# EAGLE board Zarici_hvezda (EAGLE 9.6.2)
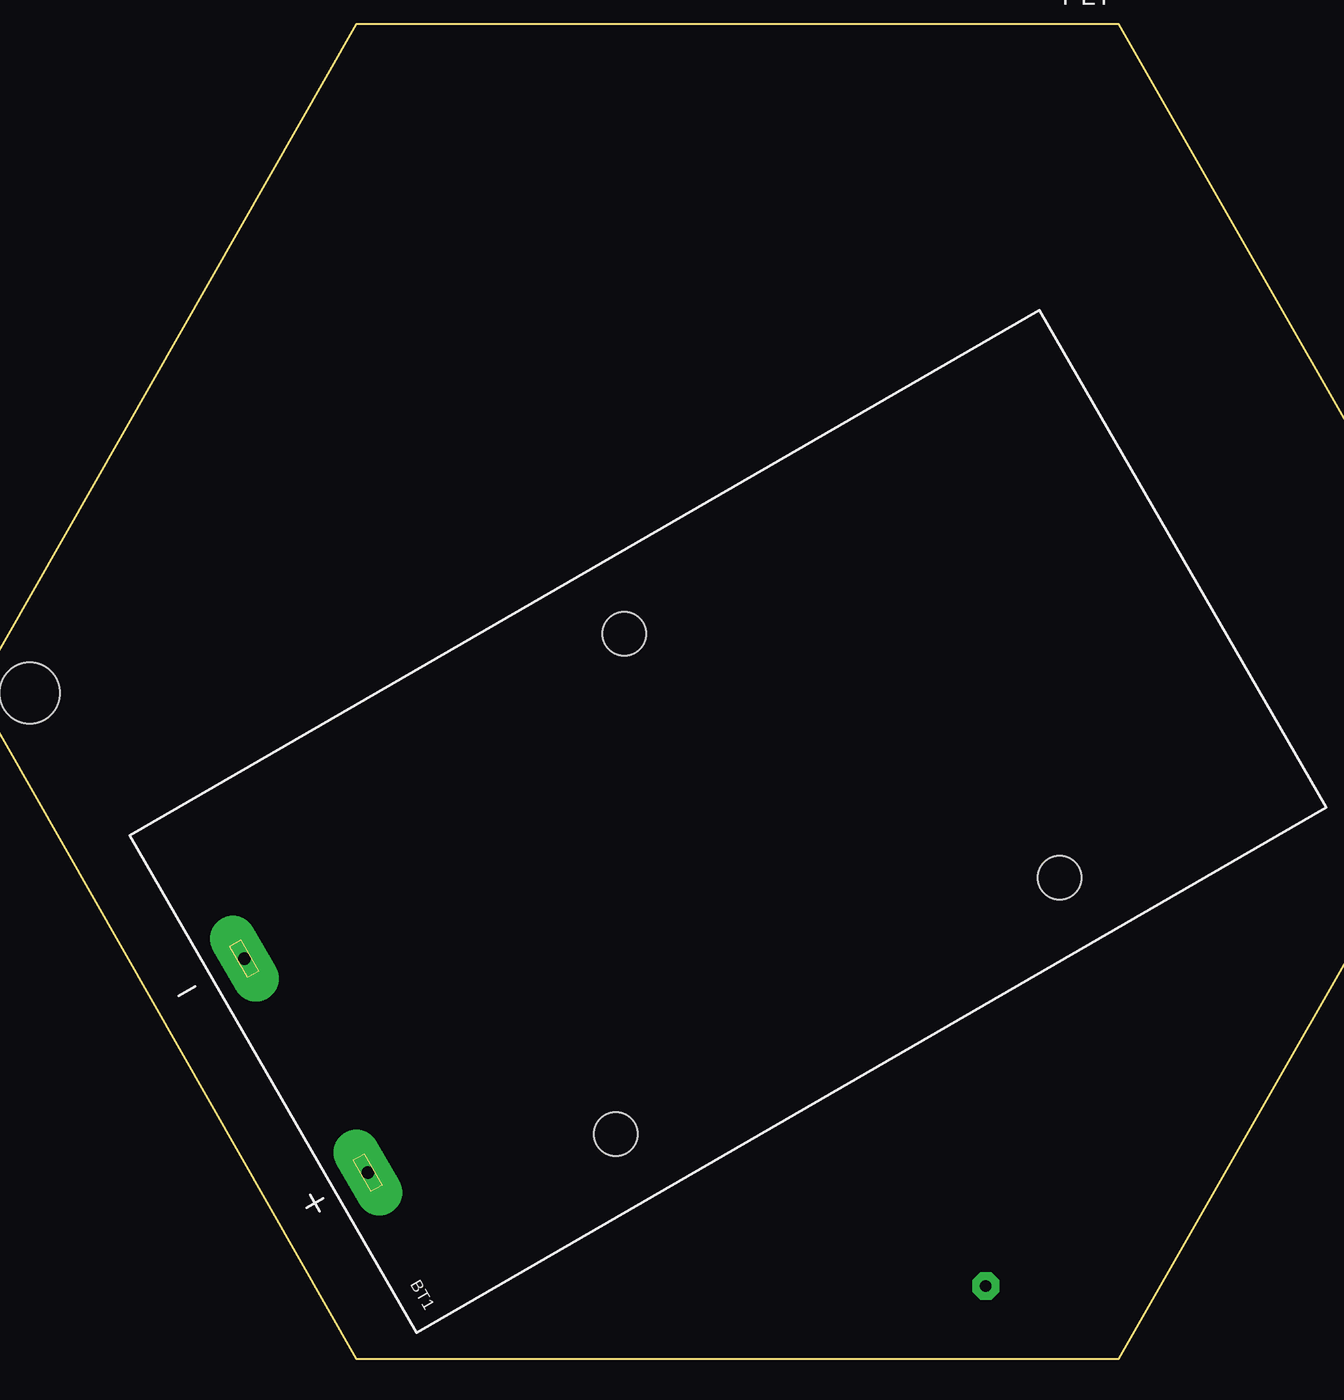
[diagram p0: board, top side]
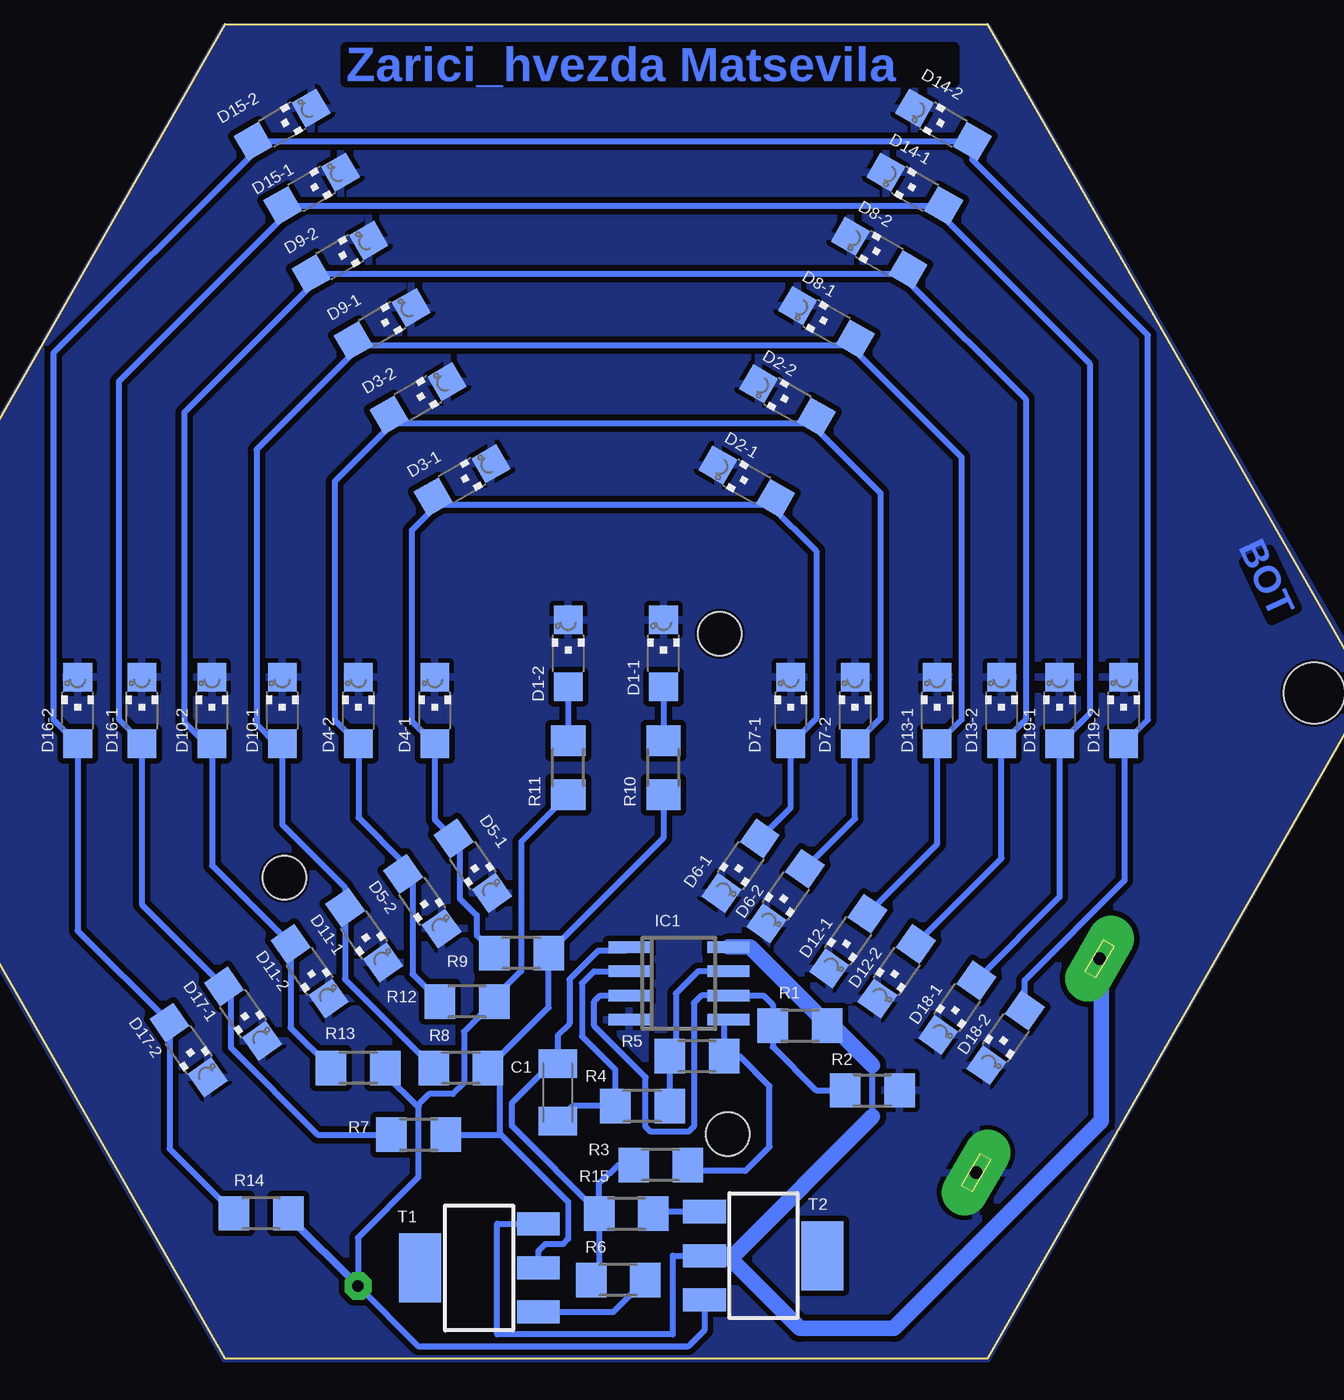
[diagram p1: board, bottom side, seen from below]

No outline drawn. Coordinates in mm, seen from the top.
Copper layers (1*16): Top 0.035mm / dielectric 1.5mm / Bottom 0.035mm
Design rules "default *": minimum track width 12mil, minimum drill 0.35mm, track to track 12mil, track to pad 12mil, pad to pad 12mil, via to via 12mil, smd to smd 12mil, copper to edge 6mil, drill to drill 6mil, minimum pad ring 10mil, minimum via ring 8mil, stop-mask expansion 4mil, vias tented up to drill 0mil, thermal gap 10mil
Holes 3.2 mm at 2.86,34.92 77.15,34.92
Milling: 6 lines

## Footprints (pad centres in the part's own frame; a part is rotated, then mirrored left to right if it is on the bottom)
BAT_BC9VPC = drill 0.66 pad 2.41 long: N 25.781,-6.477; P 25.781,6.477 | hole 2.286: 13.487,11.227; -13.386,11.227; 0,-11.278
C1206K = smd 1.5 x 2: 1 -1.5,0; 2 1.5,0
CHIPLED_1206 = smd 1.5 x 1.5: A 0,-1.75; C 0,1.75
SO08 = smd 0.6 x 2.2: 1 -1.905,-2.6; 2 -0.635,-2.6; 3 0.635,-2.6; 4 1.905,-2.6; 5 1.905,2.6; 6 0.635,2.6; 7 -0.635,2.6; 8 -1.905,2.6
R1206 = smd 1.6 x 1.803: 1 -1.422,0; 2 1.422,0
SOT223 = smd 1.219 x 2.235: 1 -2.311,-3.099; 2 0,-3.099; 3 2.311,-3.099 | smd 3.6 x 2.2: 4 0,3.099

## Placement (x,y rotation side)
BT1  BC9VPC  [BAT_BC9VPC]  39.69,28.26 210 top
C1  1M  [C1206K]  42.55,13.97 90 bottom
D1-1  RG10  [CHIPLED_1206]  37,37 0 bottom
D1-2  RG10  [CHIPLED_1206]  42,37 0 bottom
D2-1  RG10  [CHIPLED_1206]  32.63,46 60 bottom
D2-2  RG10  [CHIPLED_1206]  30.5,50.27 60 bottom
D3-1  RG10  [CHIPLED_1206]  47.57,46.08 300 bottom
D3-2  RG10  [CHIPLED_1206]  49.88,50.38 300 bottom
D4-1  RG10  [CHIPLED_1206]  49,34 0 bottom
D4-2  RG10  [CHIPLED_1206]  53,34 0 bottom
D5-1  RG10  [CHIPLED_1206]  47,25.86 215 bottom
D5-2  RG10  [CHIPLED_1206]  49.65,23.99 215 bottom
D6-1  RG10  [CHIPLED_1206]  32.95,25.86 145 bottom
D6-2  RG10  [CHIPLED_1206]  30.59,24.27 145 bottom
D7-1  RG10  [CHIPLED_1206]  30.32,34 0 bottom
D7-2  RG10  [CHIPLED_1206]  26.95,34 0 bottom
D8-1  RG5  [CHIPLED_1206]  28.45,54.37 60 bottom
D8-2  RG5  [CHIPLED_1206]  25.68,58 60 bottom
D9-1  RG5  [CHIPLED_1206]  51.75,54.27 300 bottom
D9-2  RG5  [CHIPLED_1206]  53.98,57.78 300 bottom
D10-1  RG5  [CHIPLED_1206]  57,34 0 bottom
D10-2  RG5  [CHIPLED_1206]  60.68,34 0 bottom
D11-1  RG5  [CHIPLED_1206]  52.7,22.23 215 bottom
D11-2  RG5  [CHIPLED_1206]  55.56,20.32 215 bottom
D12-1  RG5  [CHIPLED_1206]  27.3,21.91 145 bottom
D12-2  RG5  [CHIPLED_1206]  24.77,20.32 145 bottom
D13-1  RG5  [CHIPLED_1206]  22.64,34 0 bottom
D13-2  RG5  [CHIPLED_1206]  19.27,34 0 bottom
D14-1  RG3  [CHIPLED_1206]  23.82,61.37 60 bottom
D14-2  RG3  [CHIPLED_1206]  22.32,64.73 60 bottom
D15-1  RG3  [CHIPLED_1206]  55.46,61.37 300 bottom
D15-2  RG3  [CHIPLED_1206]  57,64.73 300 bottom
D16-1  RG3  [CHIPLED_1206]  64.36,34 0 bottom
D16-2  RG3  [CHIPLED_1206]  67.73,34 0 bottom
D17-1  RG3  [CHIPLED_1206]  59.05,18.1 215 bottom
D17-2  RG3  [CHIPLED_1206]  61.91,16.19 215 bottom
D18-1  RG3  [CHIPLED_1206]  21.59,18.41 145 bottom
D18-2  RG3  [CHIPLED_1206]  19.05,16.83 145 bottom
D19-1  RG3  [CHIPLED_1206]  16.22,34 0 bottom
D19-2  RG3  [CHIPLED_1206]  12.86,34 0 bottom
IC1  LMV358M  [SO08]  36.2,19.68 270 bottom
R1  22k  [R1206]  29.84,17.46 0 bottom
R2  22k  [R1206]  26.04,14.07 180 bottom
R3  10k  [R1206]  37.15,10.16 0 bottom
R4  2M2  [R1206]  38.1,13.26 0 bottom
R5  22k  [R1206]  35.24,15.88 180 bottom
R6  22k  [R1206]  39.37,4.13 0 bottom
R7  27  [R1206]  49.85,11.75 0 bottom
R8  27  [R1206]  47.62,15.24 0 bottom
R9  27  [R1206]  44.45,21.27 0 bottom
R10  100  [R1206]  37,31 270 bottom
R11  470  [R1206]  42,31 270 bottom
R12  120  [R1206]  47.31,18.73 0 bottom
R13  120  [R1206]  53.02,15.24 0 bottom
R14  120  [R1206]  58.1,7.62 0 bottom
R15  33k  [R1206]  38.95,7.62 180 bottom
T1  BCP53  [SOT223]  46.67,4.76 90 bottom
T2  BCP53  [SOT223]  31.75,5.4 270 bottom

## Library data of the parts
BT1 = BC9VPC; CENA: 51,06; DISTRIBUTOR: DigiKey; MNUMBER: BC9VPC; OBJCISLO: BC9VPC-ND
C1 = _LED_DICE_v1_1; CENA: 7; DISTRIBUTOR: Hofman elektro; MNUMBER: 1M/63V MKT RM5; OBJCIALO: 883454
D1-1 D1-2 D2-1 D2-2 D3-1 D3-2 D4-1 D4-2 D5-1 D5-2 D6-1 D6-2 D7-1 D7-2 D8-1 D8-2 D9-1 D9-2 D10-1 D10-2 D11-1 D11-2 D12-1 D12-2 D13-1 D13-2 D14-1 D14-2 D15-1 D15-2 D16-1 D16-2 D17-1 D17-2 D18-1 D18-2 D19-1 D19-2 = _LED_DICE_v1_1; CENA: 12,74; DISTRIBUTOR: MOUSER; MNUMBER: APT3216SECK/J3-PRV; OBJCISLO: 604-APT3216SECKJ3PRV
IC1 = linear; CENA: 16,54; DISTRIBUTOR: Mouser Electronics; MNUMBER: 621-LMV358SG-13; OBJCISLO: LMV358SG-13
R1 R2 R5 R6 = _UsbToUart-v1.0; CENA: 0,47; DISTRIBUTOR: Conard; MNUMBER: CRCW120622K0FKEA; OBJCISLO: 3024773
R3 = _UsbToUart-v1.0; CENA: 0,14; DISTRIBUTOR: Conard; MNUMBER: CQ06W4J0103T5E; OBJCISLO: 2889567
R4 = _UsbToUart-v1.0; CENA: 1,21; DISTRIBUTOR: Official Electronic; MNUMBER: SMD 1206 2M2; OBJCISLO: 6001910
R7-R9 = _UsbToUart-v1.0; CENA: 0,13; DISTRIBUTOR: Conard; MNUMBER: RC1206FR-0727RL; OBJCISLO: 2777361
R10 = _UsbToUart-v1.0; CENA: 0,19; DISTRIBUTOR: Conard; MNUMBER: CQ06W4F1000T5E; OBJCISLO: 2889439
R11 = _UsbToUart-v1.0; CENA: 0,33; DISTRIBUTOR: Conard; MNUMBER: 1585631; OBJCISLO: 1585631
R12-R14 = _UsbToUart-v1.0; CENA: 0,07; DISTRIBUTOR: Conard; MNUMBER: WR12X1200FTL; OBJCISLO: 2769961
R15 = _UsbToUart-v1.0; CENA: 0,11; DISTRIBUTOR: Conard; MNUMBER: 1585955; OBJCISLO: 1585955
T1 T2 = #PaJa_31; CENA: 23,26; DISTRIBUTOR: Electronic Components; MNUMBER: BCP53-16; OBJCISLO: 31551828

## Nets
+9V: BT1.N IC1.8 R1.2 T1.3 T2.2
G3: D14-2.A D15-2.A D16-2.A D17-2.A D18-2.A D19-2.A R14.1
G5: D8-2.A D9-2.A D10-2.A D11-2.A D12-2.A D13-2.A R13.1
G8: D2-2.A D3-2.A D4-2.A D5-2.A D6-2.A D7-2.A R12.1
GND: BT1.P D1-1.C D1-2.C D2-1.C D2-2.C D3-1.C D3-2.C D4-1.C D4-2.C D5-1.C D5-2.C D6-1.C D6-2.C D7-1.C D7-2.C D8-1.C D8-2.C D9-1.C D9-2.C D10-1.C D10-2.C D11-1.C D11-2.C D12-1.C D12-2.C D13-1.C D13-2.C D14-1.C D14-2.C D15-1.C D15-2.C D16-1.C D16-2.C D17-1.C D17-2.C D18-1.C D18-2.C D19-1.C D19-2.C IC1.4 R2.1
N$1: IC1.5 R3.2 R5.1
N$2: C1.2 IC1.1 R3.1 R6.1 R15.2
N$3: IC1.3 IC1.6 R1.1 R2.2
N$4: C1.1 IC1.2 R4.1
N$5: D1-1.A R10.1
N$6: IC1.7 R4.2 R5.2
N$7: D1-2.A R11.1
N$8: R6.2 T1.1
N$9: R7.2 R8.2 R9.2 R10.2 T1.2
N$10: R15.1 T2.1
N$11: R11.2 R12.2 R13.2 R14.2 T2.3
R3: D14-1.A D15-1.A D16-1.A D17-1.A D18-1.A D19-1.A R7.1
R5: D8-1.A D9-1.A D10-1.A D11-1.A D12-1.A D13-1.A R8.1
R8: D2-1.A D3-1.A D4-1.A D5-1.A D6-1.A D7-1.A R9.1

## Tracks (layer width: path | path; a pad name or v marks a point on that pad's centre or on a via)
+9V
  Bottom 0.305: T1.3 45.72,7.07 45.72,1.27 36.51,1.27 36.51,5.4 T2.2 34.78,5.46 | 26.04,12.7 26.04,15.39
  Bottom 0.813: BT1.N 14.03,20.88 14.03,12.46 24.9,1.59 29.84,1.59 33.72,5.46 34.78,5.46 | T2.2 33.34,5.4 26.04,12.7 | 26.04,15.39 28.11,17.46 R1.2 28.42,17.55 32.46,21.59 IC1.8
G3
  Bottom 0.305: D18-2.A 18.05,19.85 12.82,25.08 12.82,32.21 D19-2.A 11.59,33.52 11.59,53.69 20.8,62.9 D14-2.A D15-2.A 58.52,63.22 69,52.74 69,33.52 D16-2.A 67.73,22.44 D17-2.A 62.92,11.01 R14.1
G5
  Bottom 0.305: D12-2.A 19.27,26.25 D13-2.A 18,33.52 18,50.32 24.17,56.49 D8-2.A 24.38,56.91 D9-2.A 55.49,56.27 62.14,49.63 62.14,33.39 61,32.25 D10-2.A 60.68,25.87 D11-2.A 56.57,17.36 R13.1
G8
  Bottom 0.305: 29.3,49.08 50.97,49.08 D3-2.A 51.39,48.87 54.25,46.01 54.25,33.5 D4-2.A 53,28.38 50.65,26.04 | D2-2.A 29.3,49.08 | 29.3,49.08 25.62,45.39 25.62,33.59 D7-2.A 26.95,28.34 D6-2.A | D5-2.A 50.65,26.04 | R12.1 50.17,20.18 50.17,25.55 50.33,25.71 50.33,25.72 50.65,26.04
GND
  pour Bottom: 20,69.85 0,35.24 20,0 60.01,0 80.01,34.92 60.01,69.85
N$1
  Bottom 0.305: R3.2 35.41,9.84 32.7,9.84 31.43,11.11 31.43,14.29 33.02,15.88 R5.1 33.82,17.55 IC1.5
N$2
  Bottom 0.305: IC1.1 38.99,21.39 40.43,21.39 41.94,19.89 41.94,17.57 42.55,16.96 C1.2 42.89,15.47 44.95,13.41 44.95,12.2 R15.2 | R15.2 40.37,4.54 R6.1 | R15.2 40.37,9.21 39.88,9.7 39.83,9.7 39.37,10.16 R3.1
N$3
  Bottom 0.305: R2.2 29,14.07 31.27,16.34 R1.1 31.27,18.57 31.75,19.05 IC1.6 35.01,19.05 35.41,18.65 35.41,12.18 35.69,11.9 37.67,11.9 37.94,12.16 37.94,14.76 40.64,17.46 40.64,18.73 40.32,19.05 IC1.3
N$4
  Bottom 0.305: C1.1 41.76,13.26 R4.1 39.53,15.16 41.27,16.91 41.27,19.68 40.64,20.32 IC1.2
N$5
  Bottom 0.305: D1-1.A R10.1
N$6
  Bottom 0.305: IC1.7 35.18,20.32 36.35,19.16 36.35,16.19 R5.2 36.68,15.86 R4.2
N$7
  Bottom 0.305: D1-2.A R11.1
N$8
  Bottom 0.305: T1.1 | T1.1 39.62,2.45 R6.2
N$9
  Bottom 0.305: T1.2 43.57,5.64 43.2,6.01 42.27,6.01 42,6.28 42,8.22 45.56,11.79 | 45.56,11.79 45.56,14.6 R8.2 43.03,18.41 R9.2 37,27.3 R10.2 | R7.2 45.61,11.75 45.56,11.79
N$10
  Bottom 0.305: T2.1 37.44,7.71 R15.1
N$11  (via drill 0.61 pad 1.42)
  Bottom 0.305: T2.3 34.85,1.5 35.69,0.66 49.87,0.66 v53.02,3.81 53.02,6.35 49.85,9.53 49.85,13.17 | R11.2 44.47,27.11 44.47,20.33 45.89,18.91 R12.2 47.47,17.15 47.47,14.47 48.06,13.88 49.3,13.88 49.85,13.34 49.85,13.17 | 49.85,13.17 51.6,14.92 R13.2
  Bottom 0.406: R14.2 56.68,7.47 v53.02,3.81
R3
  Bottom 0.305: D18-1.A 16.22,24.21 D19-1.A 14.63,33.84 14.63,52.19 22.3,59.85 D14-1.A D15-1.A 56.98,59.85 65.57,51.26 65.57,33.54 64.36,32.33 D16-1.A 64.36,23.84 D17-1.A 59.7,19.17 59.7,16.32 55.13,11.75 R7.1
R5
  Bottom 0.305: D12-1.A 22.64,27.01 D13-1.A 21.36,33.52 21.36,47.28 26.94,52.85 D8-1.A 27.25,53.17 53.05,53.17 D9-1.A 53.27,52.76 58.35,47.67 58.35,33.28 57.32,32.25 D10-1.A 57,28.02 53.71,24.73 D11-1.A 53.71,19.9 R8.1
R8
  Bottom 0.305: D2-1.A 31.44,44.81 | 31.44,44.81 28.98,42.35 28.98,33.58 D7-1.A 30.32,28.92 D6-1.A | 31.44,44.81 48.69,44.81 D3-1.A 49.08,44.56 50.21,43.44 50.21,33.46 D4-1.A 49,28.29 D5-1.A 47.69,26.97 47.69,24.15 46.8,23.26 46.8,22.2 R9.1

## Text on the board
Bottom: Zarici_hvezda Matsevila | BOT
tPlace: PLT
bPlace: PLB
bStop: SMB